# Altium PCB Main.PcbDoc
Units mm, origin at the board's own origin, x right, y up, seen from the top; angles counter-clockwise.
Board outline 45.5 x 29.93 mm, 4 copper layers (Top Layer, Int1 (GND), Int2 (PWR), Bottom Layer), stack 1.561 mm thick; 35 components, 28 nets, 165 pads, 28 vias.
Unrouted connection lines stored in the file: 54.
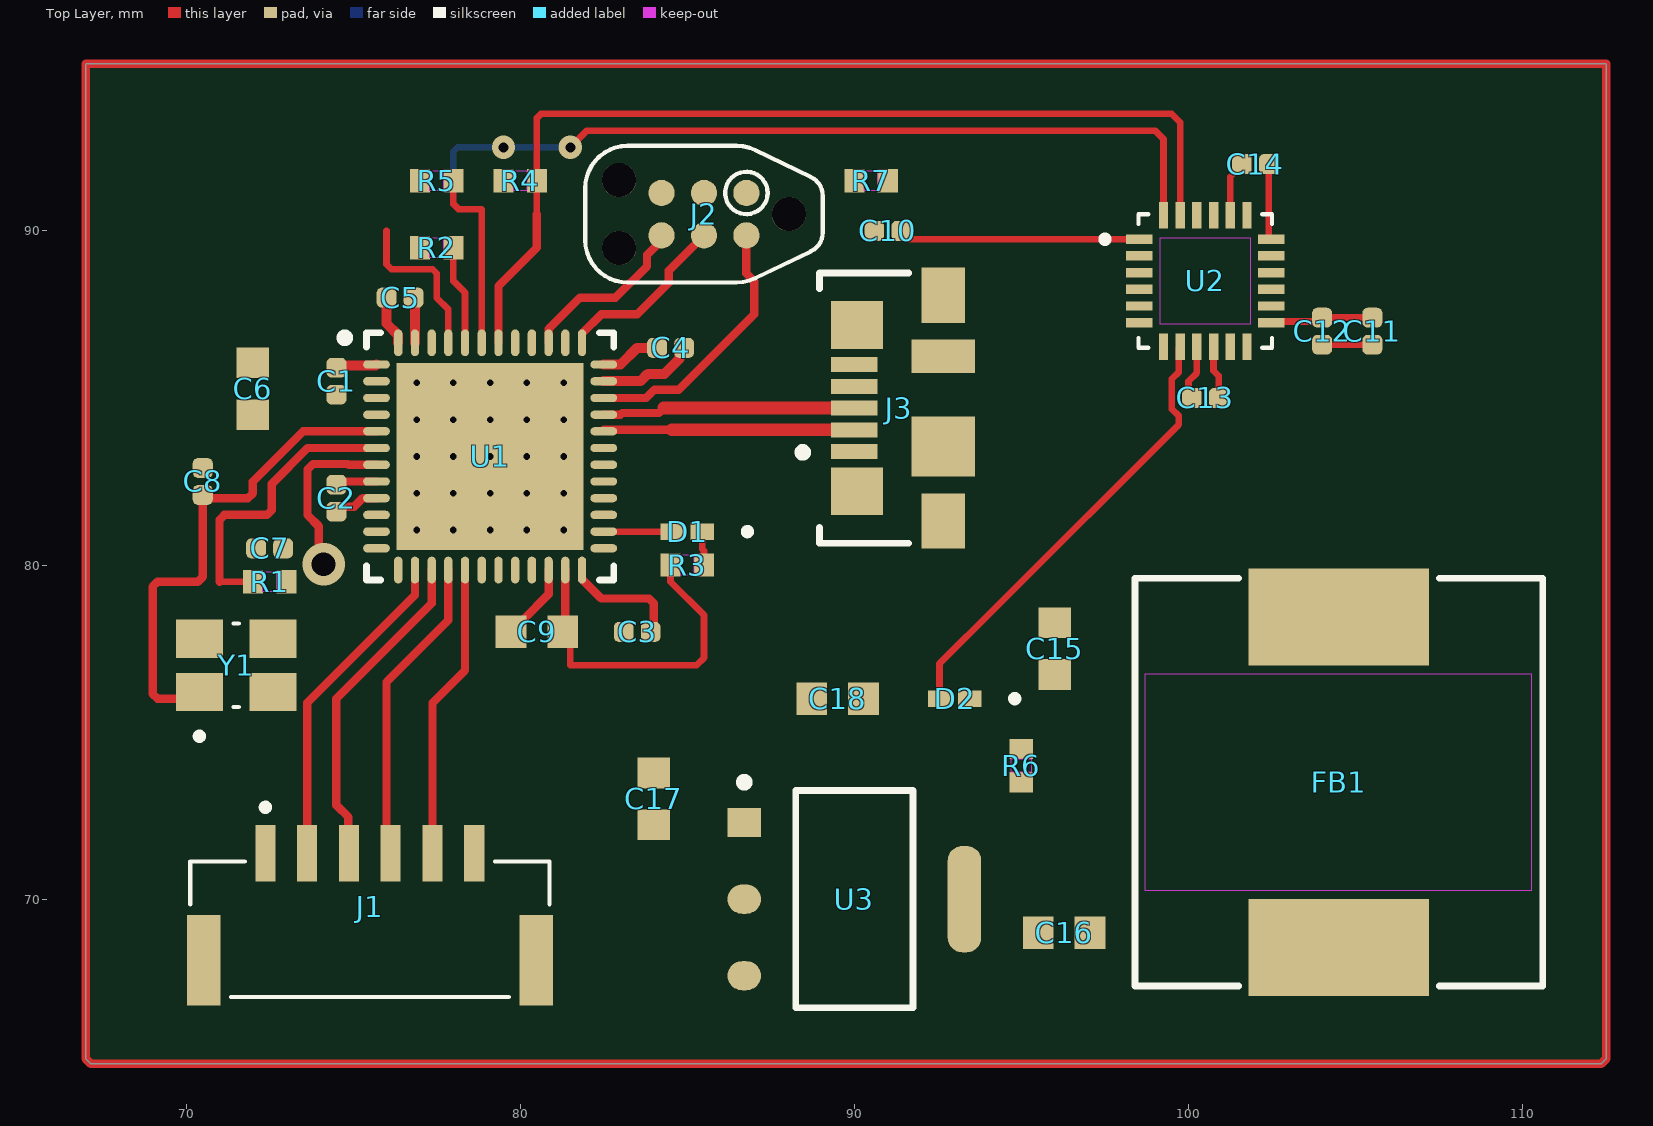
[diagram p0: Top Layer view]
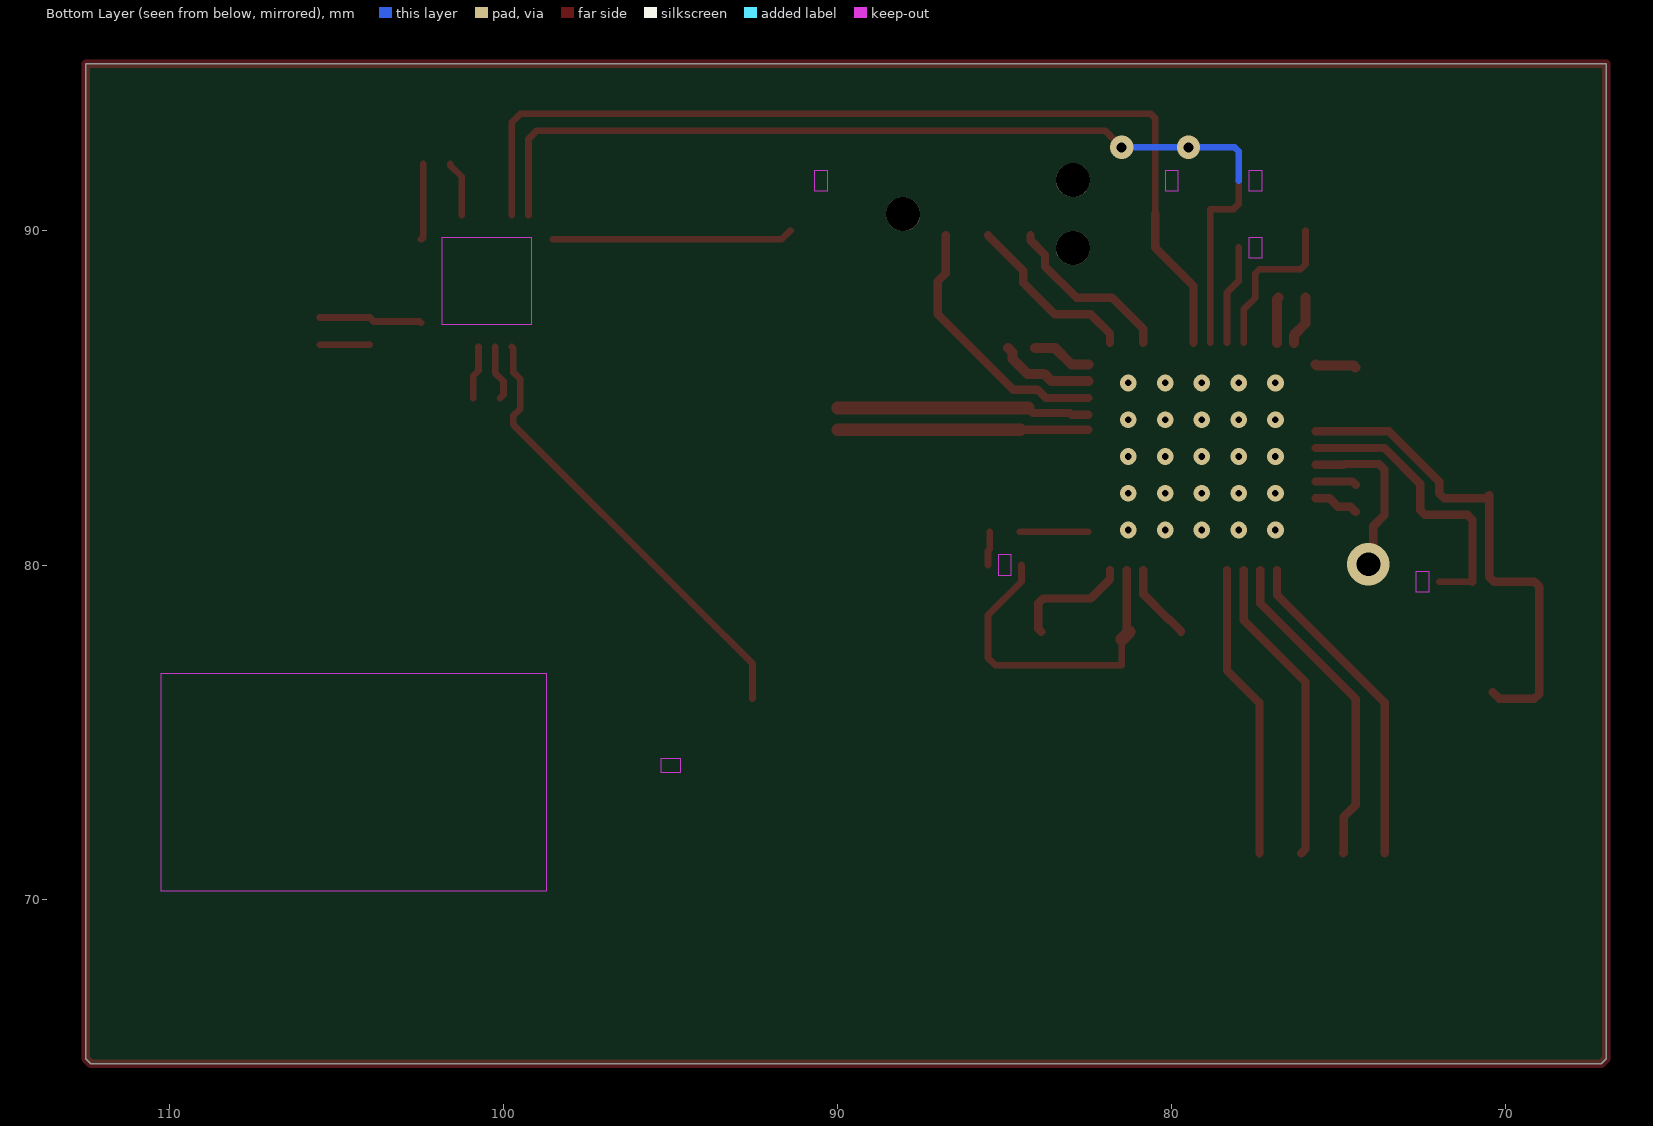
[diagram p1: Bottom Layer view, seen from below]
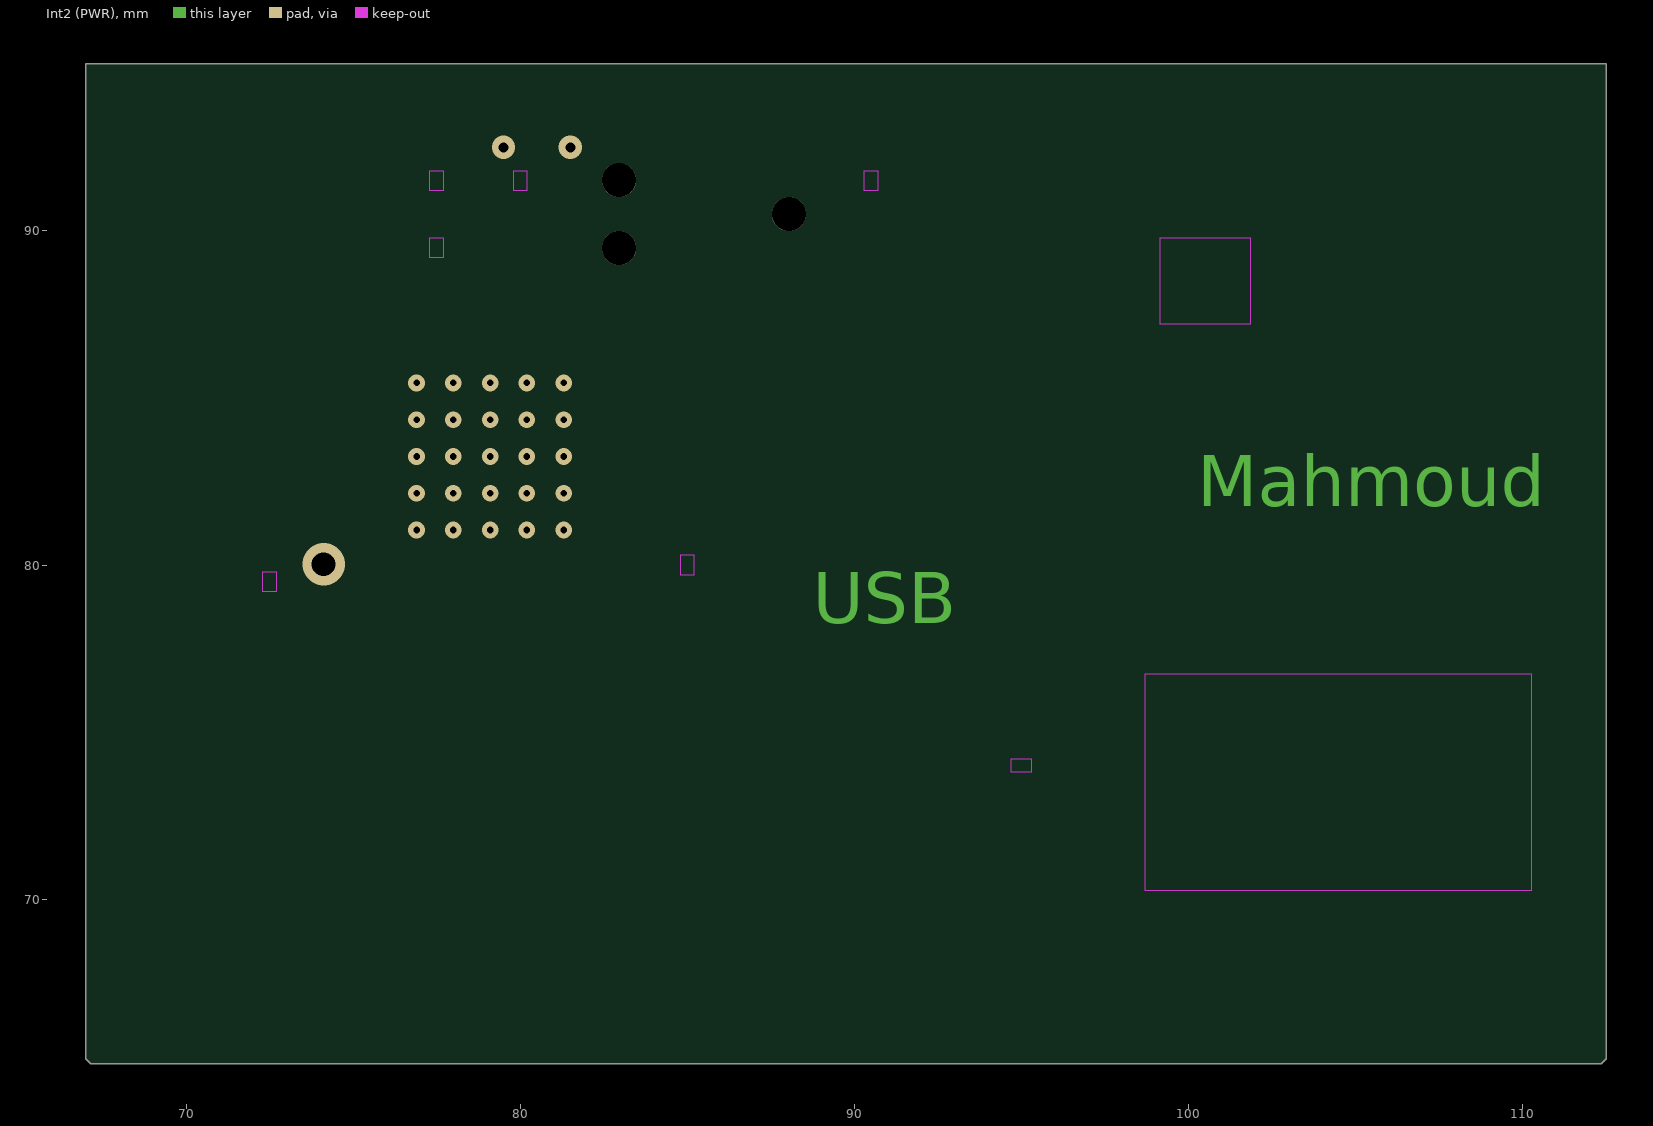
[diagram p2: Int2 (PWR)]
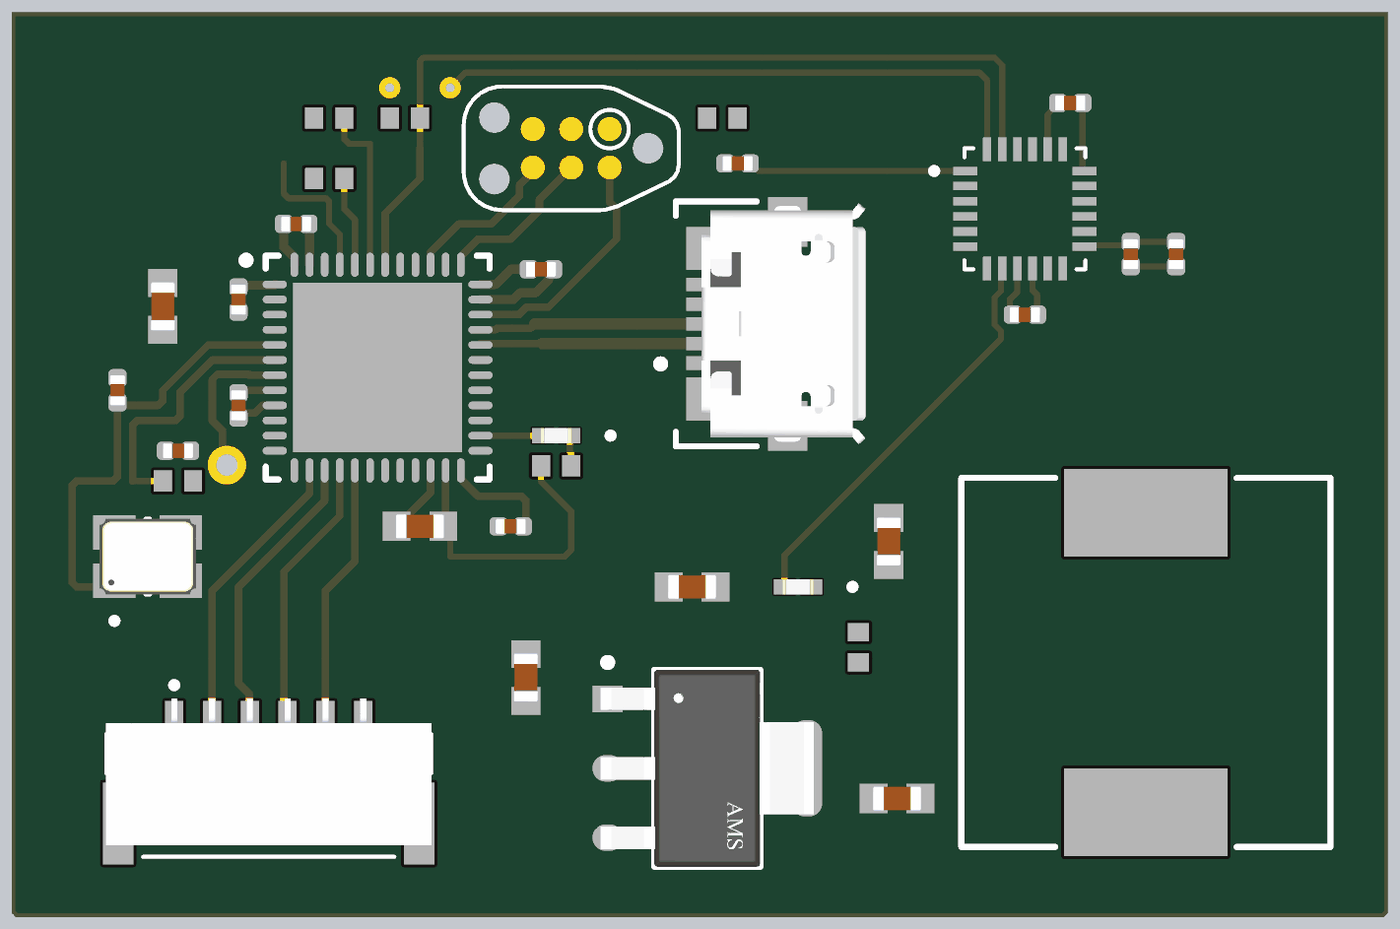
[diagram p3: 3D render of the assembled board from above, using the file's embedded part models]

## Layer stack, top to bottom
Top Solder: solder mask 0.0254, SM-001, Dk 4
Top Layer: signal copper 0.035
Dielectric 1: prepreg 0.2, PP-017, Dk 4.6
Int1 (GND): signal copper 0.0175
Dielectric 3: core 1.056, Core-039, Dk 4.6
Int2 (PWR): signal copper 0.0175
Dielectric 5: prepreg 0.2, PP-017, Dk 4.6
Bottom Layer: signal copper 0.035
Bottom Solder: solder mask 0.0254, SM-001, Dk 4

## Board outline
67,65.223 67,95 112.5,95 112.5,65.223 112.351,65.074 67.149,65.074

## Design rules (kind name [scope] priority, off if disabled: settings)
Clearance [All] p1: gap=0.2 ignorepadtopadclearanceinfootprint=FALSE
DiffPairsRouting [All] p1: maxlimit=0.254 minlimit=0.254 mostfreqgap=0.254 toplayer_minwidth=0.381 toplayer_maxwidth=0.381 toplayer_prefwidth=0.381 midlayer1_minwidth=0.381 midlayer1_maxwidth=0.381 midlayer1_prefwidth=0.381 midlayer2_minwidth=0.381 midlayer2_maxwidth=0.381 midlayer2_prefwidth=0.381 bottomlayer_minwidth=0.381 bottomlayer_maxwidth=0.381 bottomlayer_prefwidth=0.381 maxuncoupledlength=12.7
PolygonConnect [All] p1: connectstyle=Direct reliefconductorwidth=0.254 reliefentries=4 polygonreliefangle="90 Angle" airgapwidth=0.254
RoutingVias [All] p1: holewidth=0.711 width=1.27 viastyle="Through Hole" minholewidth=0.711 minwidth=1.27 maxholewidth=0.711 maxwidth=1.27
SolderMaskExpansion [All] p1: expansion=0 istentingtop=FALSE
SupplyNets "Schematic Supply Nets_4" [InNet('+3V3')] p1: voltage=0.000
SupplyNets "Schematic Supply Nets_3" [InNet('VBUS')] p2: voltage=0.000
SupplyNets "Schematic Supply Nets_2" [InNet('GND')] p3: voltage=0.000
SupplyNets "Schematic Supply Nets" [InNet('+5')] p4: voltage=0.000
UnRoutedNet [All] p1: checkbadconnections=TRUE
Width [All] p1: maxlimit=1 minlimit=0.2 preferedwidth=0.3 midlayer1_minwidth=0.254 midlayer1_maxwidth=0.254 midlayer1_prefwidth=0.254 midlayer2_minwidth=0.254 midlayer2_maxwidth=0.254 midlayer2_prefwidth=0.254 minimp=50.000000 maximp=50.000000 favimp=50.000000
28 further rules are at their usual default settings.

## Classes and differential pairs
differential pair USB_D: +USB_D_P -USB_D_N

## Components (designator, comment, footprint, x,y, rotation, side; value= is the part's Value field where it differs from the comment)
C1 "100n" CAPC1005X55N 74.5,85.5 r90 top
C2 "100n" CAPC1005X55N 74.5,82 r270 top
C3 "100n" CAPC1005X55N 83.5,78 r0 top
C4 "100n" CAPC1005X55N 84.5,86.5 r180 top
C5 "100n" CAPC1005X55N 76.405,88 r180 top
C6 "2.2u" CAPC1608X90N 72,85.275 r90 top
C7 "10p" CAPC1005X55N 72.5,80.5 r0 top
C8 "10p" CAPC1005X55N 70.5,82.5 r270 top
C9 "2u2" CAPC1608X90N 80.5,78 r180 top
C10 "2u2" CAPC1005X55N 91,90 r180 top
C11 "100n" CAPC1005X55N 105.5,87 r270 top
C12 "10n" CAPC1005X55N 104,87 r90 top
C13 "100n" CAPC1005X55N 100.5,85 r0 top
C14 "2n2" CAPC1005X55N 102,92 r180 top
C15 "2.2u" CAPC1608X90N 96,77.5 r90 top
C16 "2.2u" CAPC1608X90N 96.275,69 r0 top
C17 "22u" CAPC1608X90N 84,73 r270 top
C18 "22u" CAPC1608X90N 89.5,76 r0 top
D1 "APHHS1005LSECK/J3-PF" LED_APHHS1005LSECK/J3-PF 85,81 r180 top
D2 "APHHS1005LCGCK" LED_APHHS1005LCGCK 93,76 r180 top
FB1 "120R" WE-PF_1280 104.5,73.5 r180 top
J1 "SM06B-GHS-TB" JST_SM06B-GHS-TB 75.5,69.5 r0 top
J2 "DNP" TC2030-IDC-NL 85.5,90.5 r180 top
J3 "473460001" FP-473460001-MFG 92.306,84.696 r90 top
R1 "0R" 0402 72.5,79.5 r180 top
R2 "10k" 0402 77.5,89.5 r0 top
R3 "1k" 0402 85,80 r0 top
R4 "2k2" 0402 80,91.5 r180 top
R5 "2k2" 0402 77.5,91.5 r180 top
R6 "1k" 0402 95,74 r90 top
R7 "1k" 0402 90.5,91.5 r0 top
U1 "STM32F411CEU6" STM-UFQFPN48_L 79.1,83.25 r0 top
U2 "MPU-6050-A" QFN50P400X400X95-24N 100.5,88.5 r0 top
U3 "AMS1117-3.3" FP-AMS1117-IPC_C 90,70 r0 top
Y1 "24MHz" XTAL_TSX-3225_24.0000MF15V-C0 71.5,77 r90 top

## Footprints (in the part's own frame and the unit in brackets; to place one, negate y for a bottom-side part, rotate by r counter-clockwise, add the part's x,y. Pads: shape width x height; smd on the part's side, far side on the other; paste and mask are expansions set on the pad)
0402 [mm]
  rect 0.6x0.7 smd paste+0 mask+0.102: 1(-0.5,0) 2(0.5,0)
  Keep-Out Layer region: 0.2,-0.3 -0.2,-0.3 -0.2,0.3 0.2,0.3
CAPC1005X55N [mm]
  rrect53% 0.59x0.6 smd: 1(-0.405,0) 2(0.405,0)
  body extent -0.5,-0.25 0.5,0.25, height 0.55
CAPC1608X90N [mm]
  rect 0.92x0.97 smd: 1(-0.775,0) 2(0.775,0)
  body extent -0.8,-0.4 0.8,0.4, height 0.95
FP-473460001-MFG [mm]
  rect 0.45x1.38 smd paste+0 mask+0: 1(-1.3,2.31) 2(-0.65,2.31) 3(0,2.31) 4(0.65,2.31) 5(1.3,2.31)
  rect 1.425x1.55 smd paste+0 mask+0: 6(-2.488,2.225) 7(2.488,2.225)
  rect 1.65x1.3 smd paste+0 mask+0: 8(-3.375,-0.35) 11(3.375,-0.35)
  rect 1.8x1.9 smd paste+0 mask+0: 9(-1.15,-0.35)
  rect 1x1.9 smd paste+0 mask+0: 10(1.55,-0.35)
  silkscreen extent -4.05,0.67 4.05,3.97, body extent -4.3,-2.48 4.3,3.45, height 0.25
FP-AMS1117-IPC_C [mm]
  rect 1.004x0.872 smd paste+0 mask+0: 1(-3.295,2.29)
  rrect100% 1.004x0.872 smd paste+0 mask+0: 2(-3.295,0) 3(-3.295,-2.29)
  rrect87% 1.004x3.182 smd paste+0 mask+0: 4(3.295,0)
  silkscreen extent -3.42,-3.25 1.75,3.62, body extent -3.9,-3.35 3.9,3.35, height 0.25
JST_SM06B-GHS-TB [mm]
  rect 0.6x1.7 smd paste+0 mask+0.102: 1(-3.125,1.875) 2(-1.875,1.875) 3(-0.625,1.875) 4(0.625,1.875) 5(1.875,1.875) 6(3.125,1.875)
  rect 1x2.7 smd paste+0 mask+0.102: MP1(-4.975,-1.325) MP2(4.975,-1.325)
  silkscreen extent -5.38,-2.42 5.38,3.35, body extent -5.38,-2.05 5.38,2.8, height 4.25
LED_APHHS1005LCGCK [mm]
  rect 0.7x0.5 smd mask+0.05: 1(-0.45,0) 2(0.45,0)
  silkscreen extent -1.9,-0.1 -1.7,0.1, body extent -0.5,-0.25 0.5,0.25, height 0.5
LED_APHHS1005LSECK/J3-PF [mm]
  rect 0.7x0.5 smd mask+0.05: 1(-0.45,0) 2(0.45,0)
  silkscreen extent -1.9,-0.1 -1.7,0.1, body extent -0.5,-0.25 0.5,0.25, height 0.5
QFN50P400X400X95-24N [mm]
  rect 0.79x0.28 smd: 1(-1.97,1.25) 2(-1.97,0.75) 3(-1.97,0.25) 4(-1.97,-0.25) 5(-1.97,-0.75) 6(-1.97,-1.25) 13(1.97,-1.25) 14(1.97,-0.75) 15(1.97,-0.25) 16(1.97,0.25) 17(1.97,0.75) 18(1.97,1.25)
  rect 0.28x0.79 smd: 7(-1.25,-1.97) 8(-0.75,-1.97) 9(-0.25,-1.97) 10(0.25,-1.97) 11(0.75,-1.97) 12(1.25,-1.97) 19(1.25,1.97) 20(0.75,1.97) 21(0.25,1.97) 22(-0.25,1.97) 23(-0.75,1.97) 24(-1.25,1.97)
  Keep-Out Layer region: 1.35,-1.3 -1.35,-1.3 -1.35,1.3 1.35,1.3
  silkscreen extent -3.1,-2 2,2
STM-UFQFPN48_L [mm] "QFN, 48-Leads, Body 7.1x7.1mm, Pitch 0.5mm, Thermal Pad 5.6x5.6mm, IPC High Density"
  oval 0.8x0.25 smd: 1(-3.4,2.75) 2(-3.4,2.25) 3(-3.4,1.75) 4(-3.4,1.25) 5(-3.4,0.75) 6(-3.4,0.25) 7(-3.4,-0.25) 8(-3.4,-0.75) 9(-3.4,-1.25) 10(-3.4,-1.75) 11(-3.4,-2.25) 12(-3.4,-2.75) 25(3.4,-2.75) 26(3.4,-2.25) 27(3.4,-1.75) 28(3.4,-1.25) 29(3.4,-0.75) 30(3.4,-0.25) 31(3.4,0.25) 32(3.4,0.75) 33(3.4,1.25) 34(3.4,1.75) 35(3.4,2.25) 36(3.4,2.75)
  oval 0.25x0.8 smd: 13(-2.75,-3.4) 14(-2.25,-3.4) 15(-1.75,-3.4) 16(-1.25,-3.4) 17(-0.75,-3.4) 18(-0.25,-3.4) 19(0.25,-3.4) 20(0.75,-3.4) 21(1.25,-3.4) 22(1.75,-3.4) 23(2.25,-3.4) 24(2.75,-3.4) 37(2.75,3.4) 38(2.25,3.4) 39(1.75,3.4) 40(1.25,3.4) 41(0.75,3.4) 42(0.25,3.4) 43(-0.25,3.4) 44(-0.75,3.4) 45(-1.25,3.4) 46(-1.75,3.4) 47(-2.25,3.4) 48(-2.75,3.4)
  rect 5.6x5.6 smd: 49(0,0)
  silkscreen extent -4.47,-3.7 3.7,3.7, body extent -3.55,-3.55 3.55,3.55, height 0.6
TC2030-IDC-NL [mil]
  round 31 smd paste-39.37: 1(-50,-25) 2(-50,25) 3(0,-25) 4(0,25) 5(50,-25) 6(50,25)
  round 40 hole 40 unplated: ""(-100,0) ""(100,-40) ""(100,40)
  silkscreen extent -140,-81 140,81
WE-PF_1280 [mm]
  rect 5.4x2.9 smd paste+0 mask+0.102: 1(0,-4.95) 2(0,4.95)
  Keep-Out Layer region: 5.8,-3.25 -5.75,-3.25 -5.75,3.25 5.8,3.25
  silkscreen extent -6.1,-6.1 6.1,6.1
XTAL_TSX-3225_24.0000MF15V-C0 [mm]
  rect 1.15x1.4 smd: 1(-0.8,1.1) 2(-0.8,-1.1) 3(0.8,-1.1) 4(0.8,1.1)
  silkscreen extent -2.22,-0.08 1.25,1.2, body extent -1.25,-1.6 1.25,1.6, height 0.6

## Part data
C1 C2 C3 C4 C5 C7 C8 C10 C11 C12 C13 C14: library part C0402C103K4RAC, "10000 pF Â±10% 16V Ceramic Capacitor X7R 0402 (1005 Metric)", Package="402-2 KEMET", Check_prices=https://www.snapeda.com/parts/C0402C103K4RAC/KEMET/view-part/?ref=eda, MF=KEMET, MP=C0402C103K4RAC, SnapEDA_Link=https://www.snapeda.com/parts/C0402C103K4RAC/KEMET/view-part/?ref=snap
C6 C9 C15 C16 C17 C18: library part C0603C104J4RAC, "0.1 ÂµF Â±5% 16V Ceramic Capacitor X7R 0603 (1608 Metric)", Package="603-2 KEMET", Check_prices=https://www.snapeda.com/parts/C0603C104J4RAC/KEMET/view-part/?ref=eda, MF=KEMET, MP=C0603C104J4RAC, SnapEDA_Link=https://www.snapeda.com/parts/C0603C104J4RAC/KEMET/view-part/?ref=snap
D1: "Red 625nm LED Indication - Discrete 1.8V 0402 (1005 Metric)", Package="0402 Kingbright Corporation", Check_prices=https://www.snapeda.com/parts/APHHS1005LSECK/J3-PF/Kingbright/view-part/?ref=eda, MF=Kingbright, MP=APHHS1005LSECK/J3-PF, SnapEDA_Link=https://www.snapeda.com/parts/APHHS1005LSECK/J3-PF/Kingbright/view-part/?ref=snap
D2: "Green 570nm LED Indication - Discrete 1.9V 0402 (1005 Metric)", Package="0402 Kingbright Corporation", Check_prices=https://www.snapeda.com/parts/APHHS1005LCGCK/Kingbright/view-part/?ref=eda, MF=Kingbright, MP=APHHS1005LCGCK, SnapEDA_Link=https://www.snapeda.com/parts/APHHS1005LCGCK/Kingbright/view-part/?ref=snap
FB1: library part WE-PF_1280, "FERRITE BEAD 185 OHM 2SMD 1LN", Package="SMD-2 WÃ¼rth Elektronik", Check_prices=https://www.snapeda.com/parts/7427929115/W%25C3%25BCrth+Elektronik+Midcom/view-part/?ref=eda, MF="WÃ¼rth Elektronik", MP=7427929115, SnapEDA_Link=https://www.snapeda.com/parts/7427929115/W%25C3%25BCrth+Elektronik+Midcom/view-part/?ref=snap
J1: "Connector Header Surface Mount, Right Angle 6 position 0.049 (1.25mm)", Package=None, Check_prices=https://www.snapeda.com/parts/SM06B-GHS-TB/JST/view-part/?ref=eda, MF="JST Sales", MP=SM06B-GHS-TB, SnapEDA_Link=https://www.snapeda.com/parts/SM06B-GHS-TB/JST/view-part/?ref=snap
J2: library part TC2030-CTX, "CortexÂ® Plug-Of-Nailsâ„¢ Adapter Cable", Package=None, Availability=Unavailable, MF="Tag-Connect LLC", MP=TC2030-CTX, Price=None, SnapEDA_Link=https://www.snapeda.com/parts/TC2030-CTX/Tag-Connect%20LLC/view-part/225831/?ref=snap
J3: library part CMP-2000-05246-2, "CONN RCPT USB2.0 MICRO B SMD R/A", Current Rating=1.8A, Manufacturer=Molex, Package=0, Temperature="-30°C to +85°C", Temperature Range High=+85°C, Temperature Range Low=-30°C, Voltage Rating=30V, Automotive=No, Category=Conn, ComponentLink2Description=Datasheet, ComponentLink2URL=https://www.molex.com/webdocs/datasheets/pdf/en-us/0473460001_IO_CONNECTORS.pdf, Conn Orientation="Right Angle", Contact Material=Gold,Nickel, Device Class L1=Connectors, Device Class L2="USB Connectors", Device Class L3=unset, Digikey Description="CONN RCPT USB2.0 MICRO B SMD R/A", Footprint Url=https://www.molex.com/pdm_docs/sd/473460001_sd.pdf, Height=2.945mm, Is Female=yes, Lead Free=Yes, Manufacturer Part Number=473460001, Number Of Contacts=5, Octopart=https://octopart.com/47346-0001-molex-7164928, Pitch=0.65mm, RoHS=TRUE, Shielding=true, Usb Standard="USB 2.0"
R1 R2 R3 R4 R5 R6 R7: library part R0402, "Reducer,NEMA 1,4 X 2 1/2", Package=None, Check_prices=https://www.snapeda.com/parts/R0402/Wiegmann/view-part/?ref=eda, MF=Wiegmann, MP=R0402, SnapEDA_Link=https://www.snapeda.com/parts/R0402/Wiegmann/view-part/?ref=snap
U1: library part CMP-0243-00165-1, "ARM Cortex-M4 32-bit MCU+FPU, 512 KB Flash, 128 KB RAM, 36 I/Os, 48-Pin UFQFPN, -40 to 85 degC, Tray", I/Os (High Current)=36, Operating Frequency(F) (Processor speed) (MHz)=100, Package Description=UFQFPN48, Package Reference="48-Pin Ultra Thin Fine Pitch Quad Flat No-Lead, 7 x 7 x 0.6 mm Body, 0.5 mm Pitch, Exposed Pad", Supply Voltage(Vcc) min (V)=1.7, ComponentLink1Description="Manufacturer URL", ComponentLink1URL=http://www.st.com/, ComponentLink2Description=Datasheet, ComponentLink2URL=http://www.st.com/st-web-ui/static/active/en/resource/technical/document/datasheet/DM00115249.pdf, Core="ARM Cortex-M4", DatasheetVersion="Rev. 6", FLASH Size (Prog) (kB)=512, Internal RAM Size (kB)=128, Mounting Technology="Surface Mount", Packing=Tray
U2: Package=None, Check_prices=https://www.snapeda.com/parts/MPU-6050-A/InvenSense/view-part/?ref=eda, MF="TDK InvenSense", MP=MPU-6050-A, SnapEDA_Link=https://www.snapeda.com/parts/MPU-6050-A/InvenSense/view-part/?ref=snap
U3: library part CMP-209535-000001-1, "LDO Voltage Regulators 1A, 3.3V", Dropout Voltage=1.1V, Manufacturer="Advanced Monolithic Systems", Max Junction Temp=+125°C, Max Power Dissipation=1.2W, Max Supply Voltage=15V, Nominal Supply Current=5mA, Output Current=1A, Output Voltage=3.3V, Package=AMS1117, Temperature="-40°C to +125°C", Temperature Range Low=-40°C, Automotive=No, Category=IC, ComponentLink2Description=Datasheet, ComponentLink2URL=http://www.advanced-monolithic.com/pdf/ds1117.pdf, Device Class L1="Integrated Circuits (ICs)", Device Class L2="Power Management ICs", Device Class L3="Voltage Regulators - Linear", Height=1.8mm, Ipc Land Pattern Name=SOT229P700X180-4, Lead Free=Yes, Manufacturer Part Number=AMS1117-3.3, Number Of Outputs=1, Octopart=https://octopart.com/ams1117-3.3-advanced+monolithic+systems-25899300, Output Type=Fixed, RoHS=TRUE, Standoff Height=0.64mm, Temperature Range High=+125°C
Y1: library part TSX-3225_24.0000MF15V-C0, "24 MHz Â±10ppm Crystal 18pF 40 Ohms 4-SMD, No Lead", Package="NON STANDARD-4 EPSON", Check_prices=https://www.snapeda.com/parts/TSX-3225%2024.0000MF15V-C0/EPSON/view-part/?ref=eda, Digi-Key_Part_Number=SER4209TR-ND, MF=EPSON, MP="TSX-3225 24.0000MF15V-C0", Purchase-URL="https://pricing.snapeda.com/search/part/TSX-3225 24.0000MF15V-C0/?ref=eda", SnapEDA_Link=https://www.snapeda.com/parts/TSX-3225%2024.0000MF15V-C0/EPSON/view-part/?ref=snap

## Via types
v1: diameter 0.5, hole 0.2, Top Layer to Bottom Layer, 25 vias
v2: diameter 0.7, hole 0.3, Top Layer to Bottom Layer, 2 vias
v3: diameter 1.27, hole 0.711, Top Layer to Bottom Layer, 1 vias

## Nets (pads, with @x,y where several pads share a name; then routed paths per layer and width w, separated by ;. In a path a pad name is that pad's centre, name@x,y a point inside that pad or via, vN(x,y) a via of type N, cw(c..) or ccw(c..) an arc to the next point about the centre after c; other vN are vias at no path point)
+3V3: C1.2 C2.2 C3.2 C4.2 C5.2 C6.2 C11.1 C12.2 C18.2 D2.2 J1.1 J2.5 R4.2 R5.2 R7.1 U1.1 U1.9 U1.24 U1.36 U1.48 U2.8 U2.13 U3.2 U3.4 | length 26.3
  Top Layer w0.2: D2.2 92.55,77.05 94.232,78.732 99.71,84.21 99.71,84.457 99.5,84.667 99.5,85.566 99.71,85.776 99.71,86.49 U2.8 ; U2.13 102.51,87.29 103.885,87.29 C12.2 C11.1
  Top Layer w0.25: C2.2 74.651,81.746 75.034,81.746 75.289,82 U1.9 ; U1.24 81.85,79.575 82.425,79 83.854,79 84,78.854 84,78.095 C3.2
  Top Layer w0.3: C1.2 74.57,85.975 75.675,85.975 U1.1 ; C5.2 76,87.225 76.35,86.875 U1.48 ; U1.36 83,86 83.5,86.5 C4.2
+5: C16.2 C17.2 FB1.2 U3.3
GND: C1.1 C2.1 C3.1 C4.1 C5.1 C6.1 C7.1 C8.1 C9.1 C10.1 C11.2 C12.1 C13.1 C14.1 C15.1 C16.1 C17.1 C18.1 J1.6 J2.1 J3.5 R2.1 R3.1 R6.1 U1.8 U1.23 U1.35 U1.47 U1.49 U2.1 U2.9 U2.11 U2.18 U3.1 Y1.2 Y1.4 | length 28.5
  Top Layer w0.2: C9.1@81.5,77.775 81.5,77 85.277,77 85.5,77.223 85.5,78.5 84.5,79.5 R3.1 ; C10.1 91.431,90 91.68,89.75 U2.1 ; C13.1 100,85.095 100,85.5 100.25,85.75 U2.9 ; C14.1 102.405,89.79 102.445,89.75 U2.18 ; C12.1 C11.2
  Top Layer w0.25: C2.1 74.595,82.5 U1.8 ; C9.1 81.35,78.075 U1.23
  Top Layer w0.3: C5.1 76.85,87.96 U1.47 ; U1.35 83.599,85.5 83.82,85.721 84.315,85.721 84.764,86.171 84.764,86.359 C4.1
  Top Layer w0.381: C9.1 C9.1@81.5,77.775
  other v1: 76.9,81.05 78,81.05 79.1,81.05 80.2,81.05 81.3,81.05 76.9,82.15 78,82.15 79.1,82.15 80.2,82.15 81.3,82.15 76.9,83.25 78,83.25 79.1,83.25 80.2,83.25 81.3,83.25 76.9,84.35 78,84.35 79.1,84.35 80.2,84.35 81.3,84.35 76.9,85.45 78,85.45 79.1,85.45 80.2,85.45 81.3,85.45
"IMU CPOUT": C14.2 U2.20 | length 1.7
  Top Layer w0.2: U2.20 101.25,91.62 101.595,91.965 C14.2
"IMU INT": U1.45 U2.12 | length 4.8
  Top Layer w0.2: 76,90 76,89 76.15,88.85 77.383,88.85 77.5,88.733 77.5,88 77.85,87.65 U1.45
"IMU REGOUT": C13.2 U2.10 | length 1.6
  Top Layer w0.2: U2.10 100.75,85.813 100.905,85.658 C13.2
"IMU SCL": R4.1 U1.42 U2.23 | length 29.4
  Top Layer w0.2: 80.5,90.5 R4.1 80.5,93.383 80.617,93.5 99.5,93.5 99.75,93.25 U2.23
  Top Layer w0.25: U1.42 79.35,88.35 80.5,89.5 80.5,90.5
"IMU SDA": R5.1 U1.43 U2.24 | length 30.4
  Top Layer w0.2: R5.1 78,90.8 78.15,90.65 78.85,90.65 U1.43 ; v2(81.5,92.5) 82,93 99,93 99.25,92.75 U2.24
  Bottom Layer w0.2: 78,91.5 78,92.383 78.117,92.5 v2(79.5,92.5) v2(81.5,92.5)
"MCU BOOT0": R2.2 U1.44 | length 3
  Top Layer w0.2: R2.2 78,88.5 78.35,88.15 U1.44
"MCU LED K": D1.1 R3.2 | length 1
  Top Layer w0.2: D1.1 85.45,80.474 85.5,80.424 R3.2
"MCU NRST": J2.3
"MCU OSC IN": C8.2 U1.5 Y1.1 | length 15.1
  Top Layer w0.25: Y1.1 70.2,76 69.146,76 69,76.146 69,79.354 69.146,79.5 70.354,79.5 70.5,79.646 C8.2 70.595,82 71.854,82 72,82.146 72,82.5 73.5,84 U1.5
"MCU OSC OUT": R1.2 U1.6 | length 8.9
  Top Layer w0.2: 71,79.5 R1.2
  Top Layer w0.25: 71,79.5 71,81.354 71.146,81.5 72.422,81.5 72.568,81.646 72.568,82.432 73.636,83.5 U1.6
"MCU PA4": J1.2 U1.14 | length 9.8
  Top Layer w0.25: J1.2 73.625,75.875 76.85,79.1 U1.14
"MCU PA5": J1.3 U1.15 | length 9.8
  Top Layer w0.25: J1.3 74.858,71.392 74.858,72.454 74.5,72.812 74.5,76 77.35,78.85 U1.15
"MCU PA6": J1.4 U1.16 | length 9.3
  Top Layer w0.25: J1.4 76,71.5 76,76.5 77.85,78.35 U1.16
"MCU PA7": J1.5 U1.17 | length 8.9
  Top Layer w0.25: J1.5 77.375,75.875 78.35,76.85 U1.17
"MCU SWCLK": J2.4 U1.37 | length 5.4
  Top Layer w0.25: U1.37 81.85,86.925 82.425,87.5 83.5,87.5 84.449,88.449 84.449,88.814 J2.4
"MCU SWDIO": J2.2 U1.34 | length 8
  Top Layer w0.25: U1.34 82.863,85 83.771,85 84.017,85.246 84.746,85.246 86.5,87 87,87.5 87,88.495 86.77,88.725 J2.2
"MCU SWO": J2.6 U1.39 | length 5.2
  Top Layer w0.25: U1.39 80.85,87.061 81.789,88 82.854,88 83.793,88.939 83.793,89.283 84.23,89.72 J2.6
"MCU VCAP1": C9.2 U1.22 | length 2.3
  Top Layer w0.25: C9.2 79.725,78.025 80.06,78.36 80.085,78.36 80.85,79.125 U1.22
MCU_NRST: C10.2 R7.2 U1.7 | length 5.2
  Top Layer w0.25: v3(74.116,80.025) 73.972,80.169 73.972,81.16 73.636,81.496 73.636,82.864 73.798,83.025 74.843,83.025 74.868,83 U1.7
NetD1_2: D1.2 U1.26 U1.27 | length 2.1
  Top Layer w0.2: U1.26 D1.2
NetD2_1: D2.1 R6.2
USB_D_N: J3.2 U1.32 | length 7.5
  Top Layer w0.25: U1.32@82.5,84.046 84.546,84.046
  Top Layer w0.381: 84.546,84.046 J3.2
USB_D_P: J3.3 U1.33 | length 7.6
  Top Layer w0.25: U1.33 83,84.5 83.05,84.55 84.152,84.55 84.298,84.696
  Top Layer w0.381: 84.298,84.696 J3.3
VBUS: C15.2 FB1.1 J3.1
"XTAL IN": C7.2 R1.1 Y1.3
pads on no net: J1.MP1 J1.MP2 J2. J3.4 J3.6 J3.7 J3.8 J3.9 J3.10 J3.11 U1.2 U1.3 U1.4 U1.10 U1.11 U1.12 U1.13 U1.18 U1.19 U1.20 U1.21 U1.25 U1.28 U1.29 U1.30 U1.31 U1.38 U1.40 U1.41 U1.46 U2.2 U2.3 U2.4 U2.5 U2.6 U2.7 U2.14 U2.15 U2.16 U2.17 U2.19 U2.21 U2.22
copper on no net: | length 150.7
  Top Layer w0.254: 67,65.223 67.149,65.074 112.351,65.074 112.5,65.223 112.5,95 67.5,95 67,95 67,94.5 67,65.223

## Other copper
Int2 (PWR):
  text "Mahmoud" at 100.254,81.754 h1.52
  text "USB" at 88.754,78.254 h1.52